# EAGLE board Frequency Divider (EAGLE 6.5.0)

No outline drawn. Coordinates in mm, seen from the top.
Copper layers (1*16): Top 0.035mm / dielectric 1.5mm / Bottom 0.035mm
Design rules "default": minimum track width 10mil, minimum drill 24mil, track to track 8mil, track to pad 8mil, pad to pad 8mil, via to via 8mil, smd to smd 8mil, copper to edge 40mil, drill to drill 8mil, minimum pad ring 10mil, minimum via ring 8mil, stop-mask expansion 4mil, vias tented up to drill 0mil, thermal gap 10mil

## Placement (x,y rotation side)
E$1  [4U_2]  0,0 0 top
E$2  [3.5MM_JACK_TAYDA]  36.83,20.32 90 top
E$3  [3.5MM_JACK_TAYDA]  36.83,50.8 90 top
E$4  [LED_3MM]  45.72,160.02 0 top
E$5  [3.5MM_JACK_TAYDA]  36.83,35.56 90 top
E$6  [LED_3MM]  45.72,144.78 0 top
E$7  [3.5MM_JACK_TAYDA]  13.97,129.54 270 top
E$8  [3.5MM_JACK_TAYDA]  13.97,114.3 270 top
E$9  [3.5MM_JACK_TAYDA]  36.83,81.28 90 top
E$10  [LED_3MM]  5.08,114.3 180 top
E$11  [3.5MM_JACK_TAYDA]  36.83,66.04 90 top
E$12  [3.5MM_JACK_TAYDA]  36.83,96.52 90 top
E$13  [LED_3MM]  5.08,129.54 180 top
E$14  [3.5MM_JACK_TAYDA]  36.83,114.3 90 top
E$15  [LED_3MM]  45.72,96.52 0 top
E$16  [3.5MM_JACK_TAYDA]  36.83,129.54 90 top
E$17  [LED_3MM]  45.72,81.28 0 top
E$18  [LED_3MM]  45.72,129.54 0 top
E$19  [LED_3MM]  45.72,114.3 0 top
E$20  [LED_3MM]  45.72,66.04 0 top
E$21  [3.5MM_JACK_TAYDA]  36.83,144.78 90 top
E$22  [3.5MM_JACK_TAYDA]  13.97,160.02 270 top
E$23  [LED_3MM]  45.72,50.8 0 top
E$24  [3.5MM_JACK_TAYDA]  13.97,144.78 270 top
E$25  [LED_3MM]  45.72,35.56 0 top
E$26  [LED_3MM]  5.08,144.78 180 top
E$27  [LED_3MM]  45.72,20.32 0 top
E$28  [3.5MM_JACK_TAYDA]  36.83,160.02 90 top
E$29  [3.5MM_JACK_TAYDA]  13.97,96.52 270 top
E$30  [3.5MM_JACK_TAYDA]  13.97,66.04 270 top
E$31  [3.5MM_JACK_TAYDA]  13.97,81.28 270 top
E$32  [3.5MM_JACK_TAYDA]  13.97,35.56 270 top
E$33  [3.5MM_JACK_TAYDA]  13.97,50.8 270 top
E$34  [3.5MM_JACK_TAYDA]  13.97,20.32 270 top
E$35  [LED_3MM]  5.08,20.32 180 top
E$36  [LED_3MM]  5.08,35.56 180 top
E$37  [LED_3MM]  5.08,50.8 180 top
E$38  [LED_3MM]  5.08,66.04 180 top
E$39  [LED_3MM]  5.08,81.28 180 top
E$40  [LED_3MM]  5.08,96.52 180 top
E$41  [LED_3MM]  5.08,160.02 180 top

## Library data of the parts
E$1-E$41 = !synth_panel